# EAGLE board dc-isolation (EAGLE 5.07)
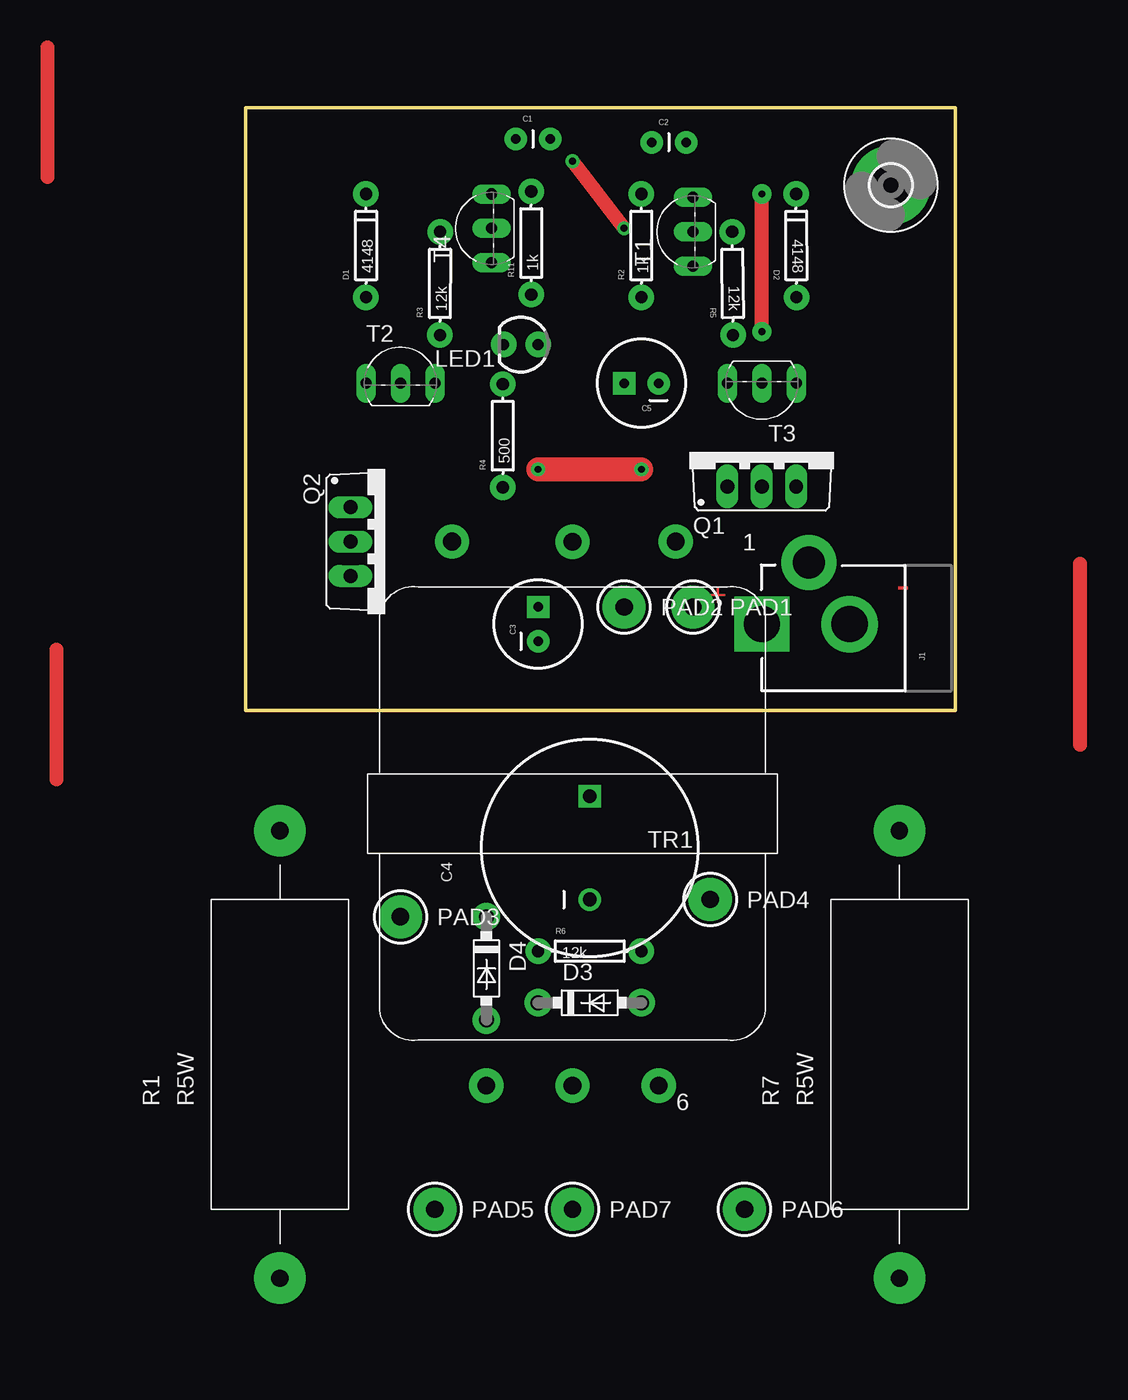
[diagram p0: board, top side]
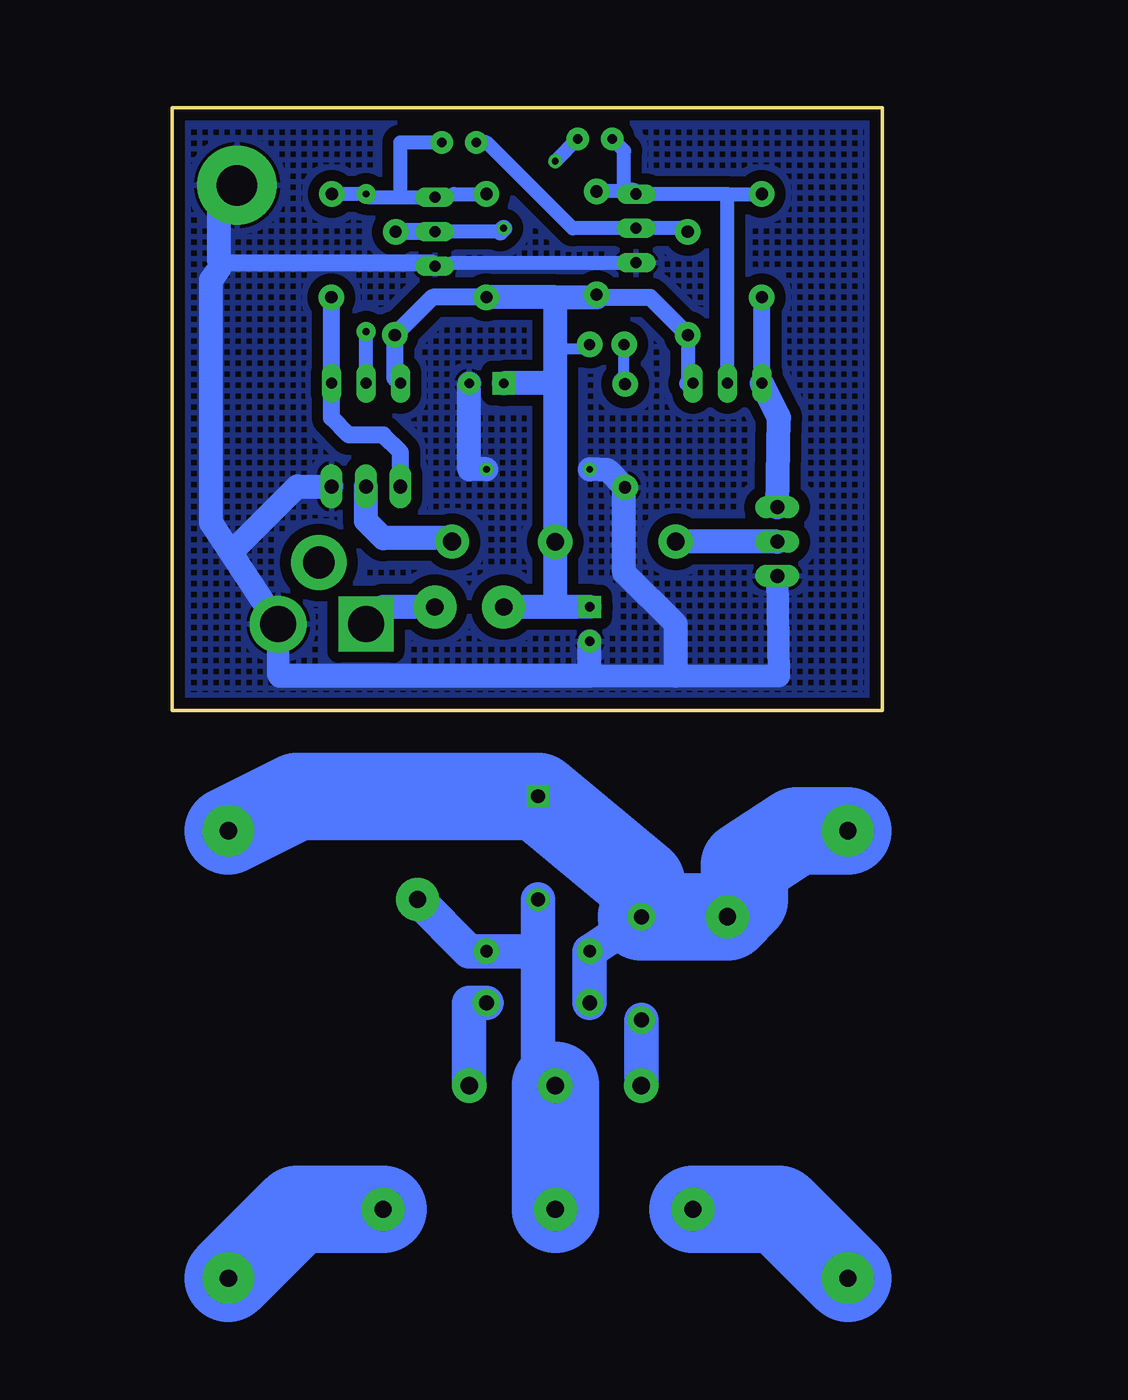
[diagram p1: board, bottom side, seen from below]

Size 52.39 x 44.45 mm. Coordinates in mm from the lower left corner, seen from the top.
Outline: 0,0 52.39,0 52.39,44.45 0,44.45 0,0
Copper layers (1*16): Top 0.035mm / dielectric 1.5mm / Bottom 0.035mm
Design rules "SparkFun-HP1007-600x600dpi": minimum track width 10mil, minimum drill 20mil, track to track 12mil, track to pad 12mil, pad to pad 12mil, via to via 12mil, smd to smd 12mil, copper to edge 12mil, drill to drill 12mil, minimum pad ring 12mil, minimum via ring 10mil, stop-mask expansion 4mil, vias tented up to drill 25mil, thermal gap 10mil

## Footprints (pad centres in the part's own frame; a part is rotated, then mirrored left to right if it is on the bottom)
CAP-PTH-SMALL = drill 0.7 pad 1.651 round: 1 0,0; 2 2.54,0
CPOL-RADIAL-100UF-25V = drill 0.7 pad 1.651 square: 1 1.27,0 | drill 0.7 pad 1.651 round: 2 -1.27,0
CPOL-RADIAL-1000UF-63V = drill 1.016 pad 1.651 square: 1 3.81,0 | drill 1.016 pad 1.676 round: 2 -3.81,0
DIODE-1N4148 = drill 0.9 pad 1.88 round: A -3.81,0; C 3.81,0
DO41-7.6 = drill 1.1 pad 2.032 round: A 3.81,0; C -3.81,0
3,0-PAD = drill 3 pad 5.842 round: B3,0 0,0
POWER_JACK_2.1X5.5_BIG_PTH = drill 2.667 pad 4.191 round: GND 0,-0.127 | drill 2.337 pad 4.064 round: GNDBREAK 4.547,2.87 | drill 2.667 pad 4.064 square: PWR 0,6.35
LED3MM = drill 0.813 pad 1.88 round: A -1.27,0; K 1.27,0
0500 = drill 1.27 pad 3.175 round: P$1 0,0
MOSFET-TO220BV = drill 1.016 long: D 0,-2.54; G -2.54,-2.54; S 2.54,-2.54
R5W = drill 1.27 pad 3.81 round: 1 0,0; 2 33.02,0
AXIAL-0.3 = drill 0.9 pad 1.88 round: P$1 -3.81,0; P$2 3.81,0
TO92-EBC = drill 0.813 long: B 0,-1.27; C 2.54,-1.27; E -2.54,-1.27
EI33-PT1W-ST1W = drill 1.3 pad 2.54 round: 1 -7.62,-20.066; 2 0,-20.038; 3 8.89,-20.066; 4 6.35,20.066; 5 0,20.066; 6 -6.35,20.066

## Placement (x,y rotation side)
C1  102  [CAP-PTH-SMALL]  19.94,42.16 0 top
C2  102  [CAP-PTH-SMALL]  29.97,41.91 0 top
C3  470uf  [CPOL-RADIAL-100UF-25V]  21.59,6.35 90 top
C4  470uf  [CPOL-RADIAL-1000UF-63V]  25.4,-10.16 90 top  (outside the outline)
C5  470uf  [CPOL-RADIAL-100UF-25V]  29.21,24.13 180 top
D1  4148  [DIODE-1N4148]  8.89,34.29 90 top
D2  4148  [DIODE-1N4148]  40.64,34.29 90.2 top
D3  1N5819-B  [DO41-7.6]  25.4,-21.59 0 top  (outside the outline)
D4  1N5819-B  [DO41-7.6]  17.78,-19.05 270 top  (outside the outline)
H3  MOUNT-PAD-ROUND3.0  [3,0-PAD]  47.62,38.73 0 top
J1  POWER_JACKPTH_BIG  [POWER_JACK_2.1X5.5_BIG_PTH]  44.45,6.35 90 top
LED1  RED  [LED3MM]  20.32,26.99 180 top
PAD1  PAD-0500  [0500]  33.02,7.62 0 top
PAD2  PAD-0500  [0500]  27.94,7.62 0 top
PAD3  PAD-0500  [0500]  11.43,-15.24 0 top  (outside the outline)
PAD4  PAD-0500  [0500]  34.29,-13.97 0 top  (outside the outline)
PAD5  PAD-0500  [0500]  13.97,-36.83 0 top  (outside the outline)
PAD6  PAD-0500  [0500]  36.83,-36.83 0 top  (outside the outline)
PAD7  PAD-0500  [0500]  24.13,-36.83 0 top  (outside the outline)
Q1  IRF640  [MOSFET-TO220BV]  38.1,19.05 0 top
Q2  IRF640  [MOSFET-TO220BV]  10.29,12.45 270 top
R1  R5W  [R5W]  2.54,-41.91 90 top  (outside the outline)
R2  1k  [AXIAL-0.3]  29.21,34.29 90 top
R3  12k  [AXIAL-0.3]  14.35,31.5 89.9 top
R4  500  [AXIAL-0.3]  18.99,20.26 90 top
R5  12k  [AXIAL-0.3]  35.94,31.5 90.5 top
R6  12k  [AXIAL-0.3]  25.4,-17.78 0 top  (outside the outline)
R7  R5W  [R5W]  48.26,-41.91 90 top  (outside the outline)
R11  1k  [AXIAL-0.3]  21.08,34.48 90 top
T1  8050  [TO92-EBC]  31.75,35.31 90 top
T2  8050  [TO92-EBC]  11.43,25.4 0 top
T3  8050  [TO92-EBC]  38.1,22.86 180 top
T4  8050  [TO92-EBC]  16.89,35.56 90 top
TR1  TRANS-CTEI33--CT1CT1  [EI33-PT1W-ST1W]  24.13,-7.62 180 top

## Library data of the parts
C1-C5 D1-D4 J1 LED1 Q1 Q2 R2-R6 R11 T1-T4 TR1 = digital-toy
H3 = holes
PAD1-PAD7 = dpads
R1 R7 = wheat

## Nets
GND: C3.2 C5.2 H3.B3,0 J1.GND Q1.S Q2.S R4.P$1 T1.E T4.E
N$1: LED1.K R4.P$2
N$2: D1.A Q2.G T2.E
N$3: Q1.D TR1.1
N$5: J1.PWR PAD1.P$1
N$6: C1.1 D1.C R11.P$2 T2.B T4.C
N$7: Q2.D TR1.3
N$8: C2.1 R3.P$2 T4.B
N$9: C1.2 R5.P$2 T1.B
N$10: C2.2 D2.C R2.P$2 T1.C T3.B
N$11: D2.A Q1.G T3.E
N$12: PAD5.P$1 R1.1
N$13: D3.A TR1.6
N$14: C4.2 PAD4.P$1 PAD7.P$1 R6.P$2 TR1.5
N$15: C4.1 D3.C D4.C PAD3.P$1 R1.2 R6.P$1 R7.2
N$16: D4.A TR1.4
N$17: PAD6.P$1 R7.1
VCC: C3.1 C5.1 LED1.A PAD2.P$1 R2.P$1 R3.P$1 R5.P$1 R11.P$1 T2.C T3.C TR1.2

## Tracks (layer width: path | path; a pad name or v marks a point on that pad's centre or on a via)
GND  (via drill 0.51)
  Top 1.778: v21.59,17.78 v29.21,17.78
  Bottom 0.813: 48.03,11.58 48.03,11.66
  Bottom 1.016: T4.E 31.62,33.02 T1.E
  Bottom 1.27: 44.45,2.54 44.58,2.67 | 48.93,37.43 H3.B3,0 | 48.93,32.6 48.93,33.02 33.27,33.02 T1.E
  Bottom 1.676: 21.59,2.54 15.24,2.54 7.62,2.54 Q2.S | 44.58,2.67 J1.GND
  Bottom 1.778: 48.93,32.6 49.53,31.75 49.53,13.84 48.03,11.58 J1.GND | 44.45,2.54 21.59,2.54 C3.2 | 48.93,33.02 48.93,37.43 | Q1.S 43.18,16.51 48.03,11.66 | 15.24,2.54 15.24,6.35 19.05,10.16 19.05,16.38 R4.P$1 20.26,17.72 v21.59,17.78 | C5.2 30.48,17.78 v29.21,17.78
  pour Bottom (isolate 0.813, hatched): -7.3,48.58 63.18,49.53 63.18,-4.45 62.87,-1.91 -8.89,1.27
N$1
  Bottom 0.813: 19.05,24.13 LED1.K
  Bottom 1.778: R4.P$2 19.05,24.13
N$2
  Bottom 1.27: T2.E D1.A
  Bottom 1.778: Q2.G 7.62,21.59 T2.E
N$3
  Bottom 1.778: TR1.1 32,12.7 36.83,12.7 38.1,13.97 Q1.D
N$5
  Bottom 1.778: PAD1.P$1 36.83,7.62 J1.PWR
N$6
  Bottom 1.016: T2.B 11.43,38.1 | 11.43,38.1 T4.C | 11.43,38.1 D1.C | R11.P$2 19.05,38.29 19.05,41.27 C1.1
  Bottom 1.27: T4.C 18.35,38.29 19.05,38.29
N$7
  Bottom 1.778: Q2.D TR1.3
N$8
  Bottom 1.016: 14.61,35.56 T4.B 22.86,35.56 29.21,41.91 C2.1
  Bottom 1.27: R3.P$2 14.61,35.56
N$9  (via drill 0.51)
  Top 1.016: v24.13,40.51 v27.94,35.56
  Bottom 1.016: C1.2 v24.13,40.51 | 28.19,35.31 T1.B
  Bottom 1.27: T1.B R5.P$2 | v27.94,35.56 28.19,35.31
N$10  (via drill 0.51 pad 1.42)
  Top 1.016: v38.1,27.94 v38.1,38.1
  Bottom 1.016: 35.56,37.85 37.85,37.85 v38.1,38.1 D2.C | 35.56,37.85 T1.C 31.62,38.1 R2.P$2 | T3.B v38.1,27.94 | C2.2 35.56,41.91 35.56,37.85
  Bottom 1.27: v38.1,38.1
N$11
  Bottom 1.27: D2.A 40.65,25.41 T3.E 40.64,21.59 39.37,20.32 36.83,20.32 35.56,19.05 Q1.G
N$12
  Bottom 6.452: PAD5.P$1 7.62,-36.83 R1.1
N$13
  Bottom 2.54: TR1.6 30.48,-21.59 D3.A
N$14
  Bottom 2.54: TR1.5 25.4,-26.42 25.4,-17.78 | 25.4,-17.78 R6.P$2 30.48,-17.78 PAD4.P$1 | 25.4,-17.78 C4.2
  Bottom 6.452: TR1.5 PAD7.P$1
N$15
  Bottom 2.54: 17.78,-12.7 D4.C R6.P$1 D3.C
  Bottom 6.452: 17.78,-12.7 C4.1 43.18,-6.35 R7.2 | D4.C PAD3.P$1 10.16,-13.97 10.16,-11.43 6.35,-8.89 R1.2
N$16
  Bottom 2.54: D4.A TR1.4
N$17
  Bottom 6.452: PAD6.P$1 43.18,-36.83 R7.1
N$18
  Top 1.016: -14.61,39.37 -14.61,48.9
N$26
  Top 1.016: 61.59,-2.54 61.59,10.79
N$28
  Top 1.016: -13.97,4.45 -13.97,-5.08
VCC
  Bottom 0.813: LED1.A 21.91,26.67 24.13,26.67
  Bottom 1.016: R3.P$1 14.34,24.13
  Bottom 1.27: R11.P$1 21.08,30.48 17.14,30.48 R3.P$1 | 14.34,24.13 T2.C | R2.P$1 33.18,30.48 R5.P$1 35.97,24.54 T3.C
  Bottom 1.778: 24.13,24.13 TR1.2 24.13,7.62 | 24.13,30.48 21.08,30.48 | 24.13,30.48 R2.P$1 | 24.13,24.13 C5.1 | 24.13,24.13 24.13,26.67 24.13,30.48 | C3.1 24.13,7.62 | 24.13,7.62 PAD2.P$1

## Text on the board
Top: + | -